# Altium PCB Seets_controller.PcbDoc
Units mm, origin at the board's own origin, x right, y up, seen from the top; angles counter-clockwise.
Board outline 152.4 x 91.44 mm, 2 copper layers (Top Layer, Bottom Layer); 38 components, 34 nets, 140 pads, 32 vias.
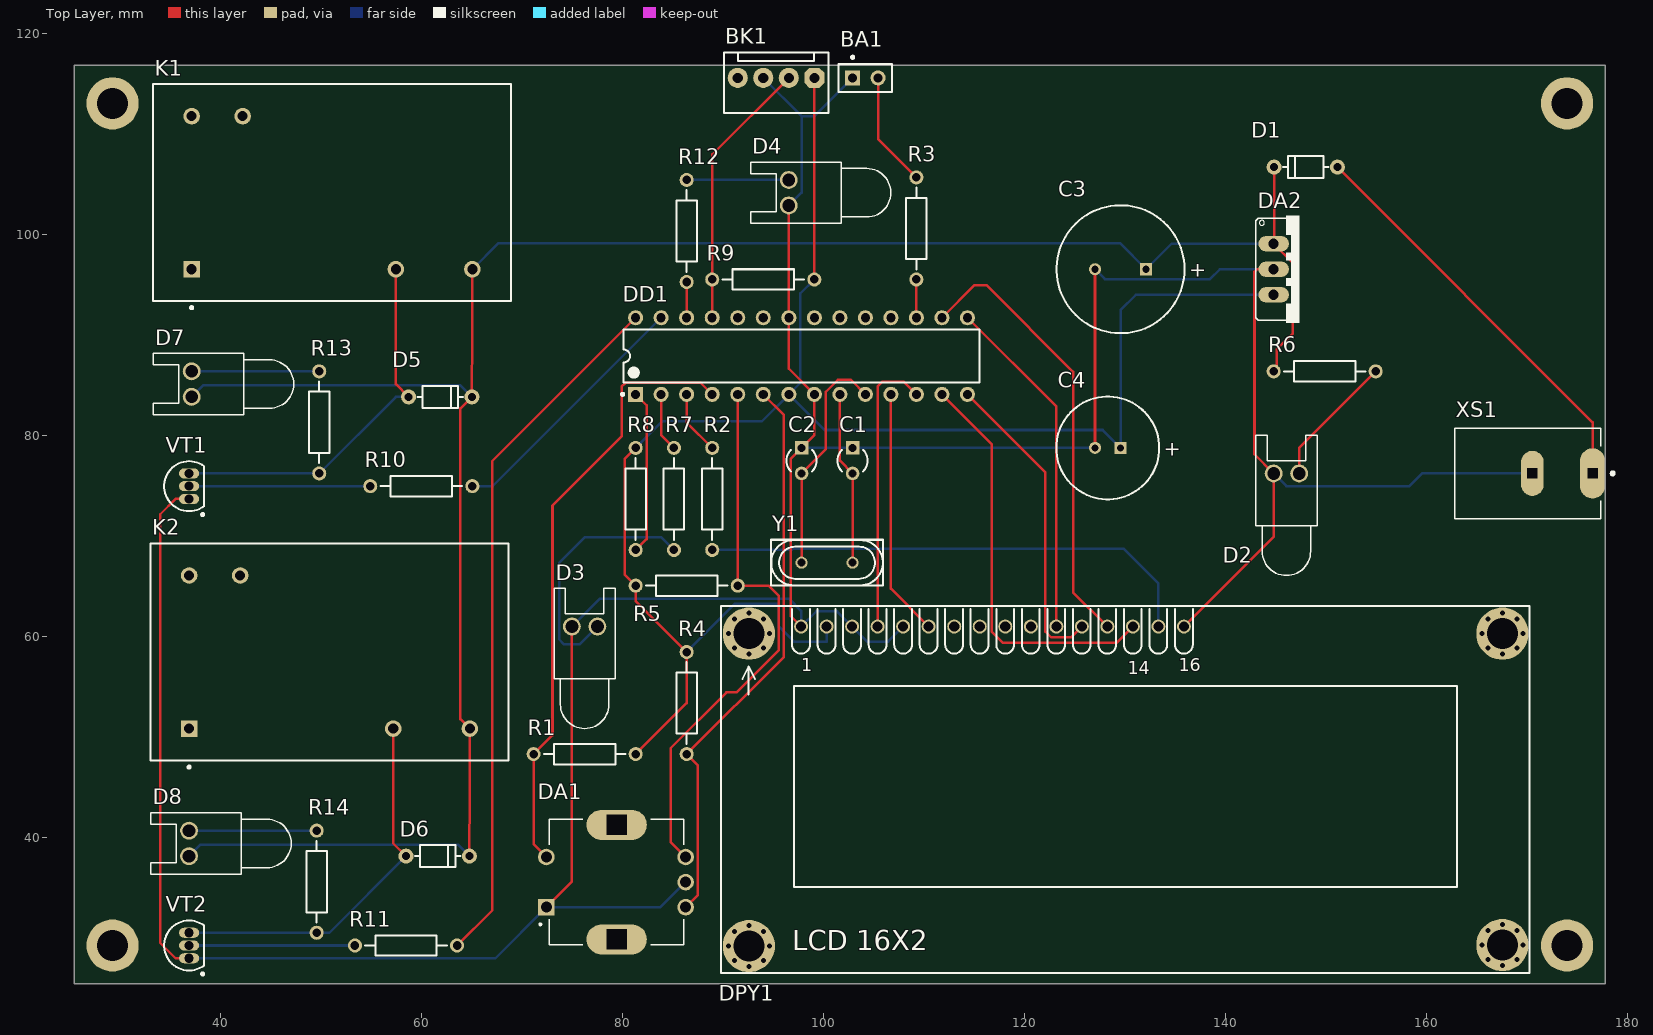
[diagram p0: Top Layer view]
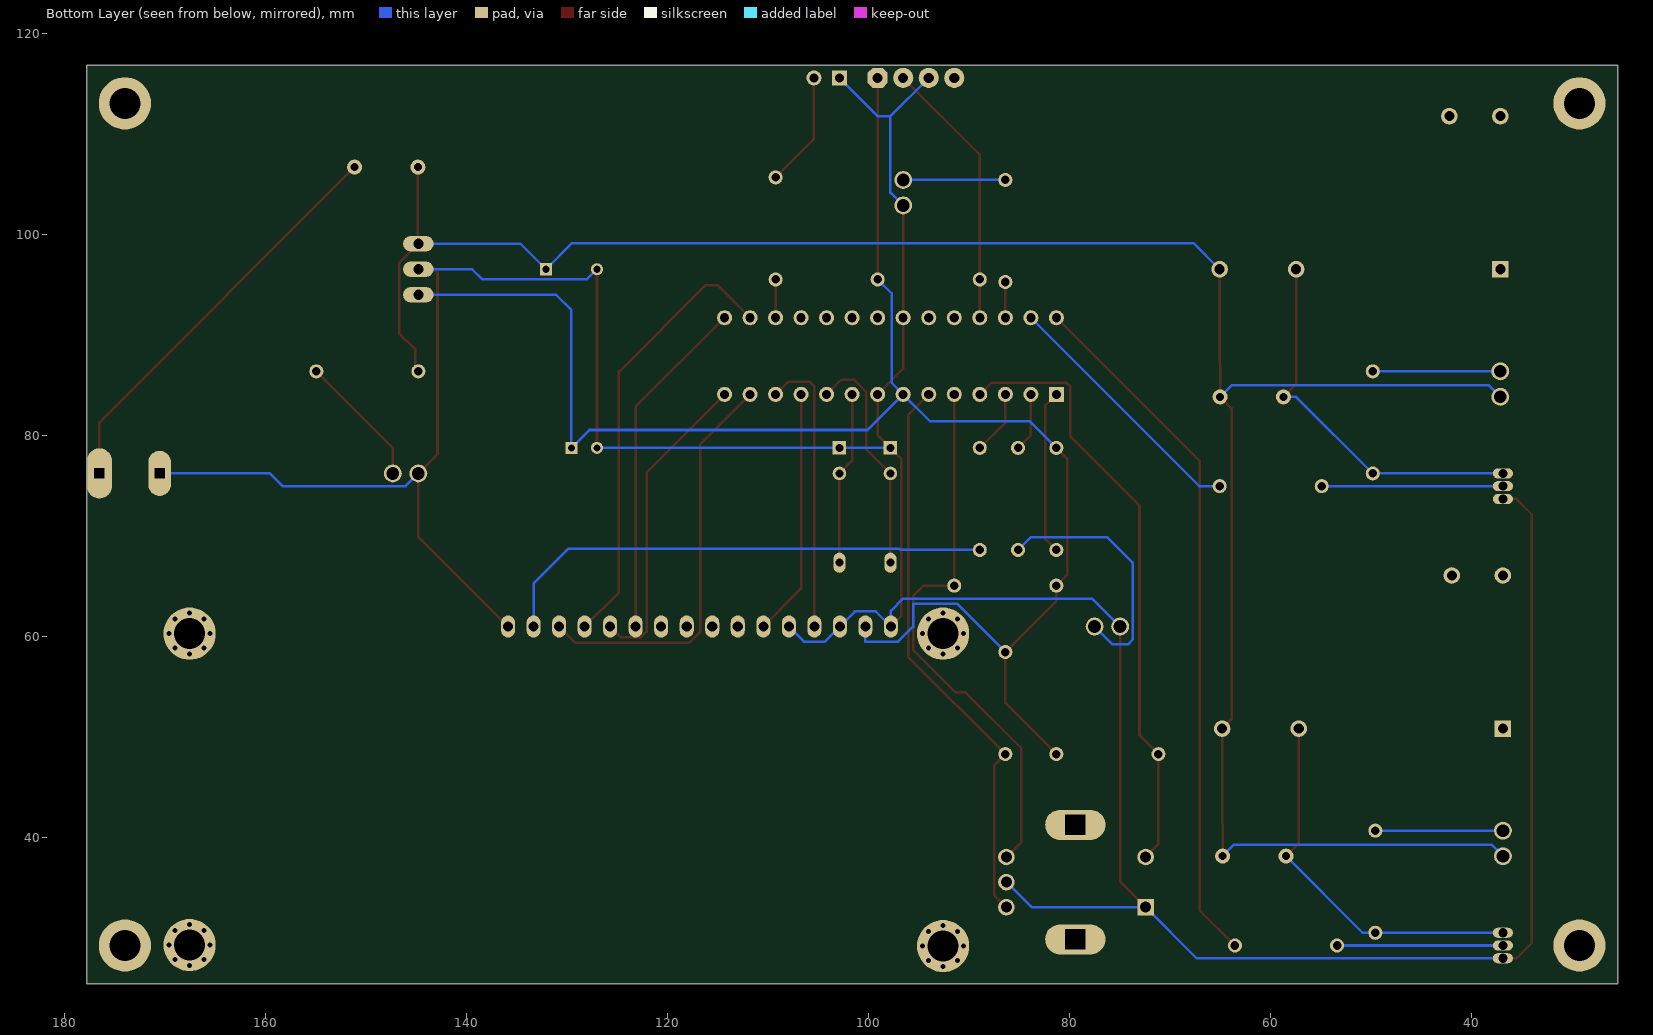
[diagram p1: Bottom Layer view, seen from below]

## Layer stack, top to bottom
Top Solder: solder mask 0.0102, Solder Resist, Dk 3.5
Top Layer: signal copper 0.0356
Dielectric 1: dielectric 0.32, FR-4, Dk 4.8
Bottom Layer: signal copper 0.0356
Bottom Solder: solder mask 0.0102, Solder Resist, Dk 3.5

## Board outline
25.4,25.4 177.8,25.4 177.8,116.84 25.4,116.84

## Design rules (kind name [scope] priority, off if disabled: settings)
Clearance [All] p1: gap=0.254 ignorepadtopadclearanceinfootprint=FALSE except(0: Arc-Hole Track-Hole SMDPad-Hole THPad-Hole Via-Hole Fill-Hole Poly-Hole Region-Hole Text-Hole)
PolygonConnect [All] p1: connectstyle=Relief reliefconductorwidth=0.254 reliefentries=4 polygonreliefangle="90 Angle" airgapwidth=0.254
RoutingVias [All] p1: holewidth=0.711 width=1.27 viastyle="Through Hole" minholewidth=0.711 minwidth=1.27 maxholewidth=0.711 maxwidth=1.27
SolderMaskExpansion [All] p1: expansion=0.102
Width [All] p1: maxlimit=0.254 minlimit=0.254 preferedwidth=0.254
30 further rules are at their usual default settings.

## Components (designator, comment, footprint, x,y, rotation, side; value= is the part's Value field where it differs from the comment)
BA1 "" PIN2 102.87,115.57 r0 top
BK1 "" WF_4 95.25,115.57 r180 top
C1 "" CAPR5-4X5 102.87,77.47 r270 top
C2 "" CAPR5-4X5 97.79,77.47 r270 top
C3 "" RB7.6-15 129.54,96.52 r0 top
C4 "" POLAR0.8 128.27,78.74 r0 top
D1 "" D_AX03_DO35 147.828,106.68 r180 top
D2 "" LED-0 146.05,76.2 r0 top
D3 "" LED-0 76.2,60.96 r0 top
D4 "" LED-0 96.52,104.14 r90 top
D5 "" D_AX03_DO35 61.976,83.82 r0 top
D6 "" D_AX03_DO35 61.722,38.1 r0 top
D7 "" LED-0 37.084,85.09 r90 top
D8 "" LED-0 36.83,39.37 r90 top
DA1 "PEC11R-4215F-S0024" XDCR_PEC11R-4215F-S0024 79.39,35.52 r90 top
DA2 "" 78XXS 147.32,96.52 r270 top
DD1 "ATmega8-16PU" 28P3 97.79,87.884 r90 top
DPY1 "" LCDCHAR_16X2_BLU 130.048,44.704 r0 top
K1 "" MODULE5B 51.054,104.14 r0 top
K2 "" MODULE5B 50.8,58.42 r0 top
R1 "" AXIAL-0.4 76.2,48.26 r180 top
R2 "" AXIAL-0.4 88.9,73.66 r90 top
R3 "" AXIAL-0.4 109.22,100.584 r270 top
R4 "" AXIAL-0.4 86.36,53.34 r90 top
R5 "" AXIAL-0.4 86.36,65.024 r180 top
R6 "" AXIAL-0.4 149.86,86.36 r0 top
R7 "" AXIAL-0.4 85.09,73.66 r270 top
R8 "" AXIAL-0.4 81.28,73.66 r90 top
R9 "" AXIAL-0.4 93.98,95.504 r0 top
R10 "" AXIAL-0.4 59.944,74.93 r0 top
R11 "" AXIAL-0.4 58.42,29.21 r0 top
R12 "" AXIAL-0.4 86.36,100.33 r90 top
R13 "" AXIAL-0.4 49.784,81.28 r90 top
R14 "" AXIAL-0.4 49.53,35.56 r90 top
VT1 "" TO-92A 36.83,74.93 r0 top
VT2 "" TO-92A 36.83,29.21 r0 top
XS1 "Power_connector" CUI_PJ-037AH 176.53,76.2 r180 top
Y1 "" XTLT_2 100.33,67.31 r180 top

## Footprints (in the part's own frame and the unit in brackets; to place one, negate y for a bottom-side part, rotate by r counter-clockwise, add the part's x,y. Pads: shape width x height; smd on the part's side, far side on the other; paste and mask are expansions set on the pad)
28P3 [mm] "DIP, 28-Leads, Row Spacing 7.62mm, Pitch 2.54mm, Body 34.67x7.3mm"
  rect 1.5x1.5 hole 0.9: 1(-3.81,16.51)
  round 1.5 hole 0.9: 2(-3.81,13.97) 3(-3.81,11.43) 4(-3.81,8.89) 5(-3.81,6.35) 6(-3.81,3.81) 7(-3.81,1.27) 8(-3.81,-1.27) 9(-3.81,-3.81) 10(-3.81,-6.35) 11(-3.81,-8.89) 12(-3.81,-11.43) 13(-3.81,-13.97) 14(-3.81,-16.51) 15(3.81,-16.51) 16(3.81,-13.97) 17(3.81,-11.43) 18(3.81,-8.89) 19(3.81,-6.35) 20(3.81,-3.81) 21(3.81,-1.27) 22(3.81,1.27) 23(3.81,3.81) 24(3.81,6.35) 25(3.81,8.89) 26(3.81,11.43) 27(3.81,13.97) 28(3.81,16.51)
  silkscreen extent -3.93,-17.7 2.65,17.93, body extent -3.6,-17.65 3.6,17.65, height 4.58
78XXS [mil]
  oval 60x120 hole 40: 1(-100,-100) 2(0,-100) 3(100,-100)
  silkscreen extent -210,-170 210,0
AXIAL-0.4 [mm] "Axial Device, Thru-Hole; 2 Leads; 0.4 in Pin Spacing"
  round 1.4 hole 0.85: 1(-5.08,0) 2(5.08,0)
  silkscreen extent -4.06,-1.02 4.06,1.02
CAPR5-4X5 [mm] "Capacitor; 2 Leads"
  rect 1.35x1.35 hole 0.8: 1(-1.27,0)
  round 1.35 hole 0.8: 2(1.27,0)
  silkscreen extent -1.06,-1.5 1.06,1.5
CUI_PJ-037AH [mm]
  oval 2.5x5 hole 1 square: 1(0,0)
  oval 2.25x4.5 hole 1 square: 2(6,0)
  silkscreen extent -2.15,-4.5 13.7,4.5, body extent -0.8,-4.5 13.7,4.5, height 11
D_AX03_DO35 [mm] "DIODE 0.3 INCH SPACING DO35"
  round 1.5 hole 0.8: 1(-3.3,0) 2(3,0)
  silkscreen extent -2.39,-1.1 2.1,1.1, body extent -4.19,-0.96 3.99,0.96, height 1.96
LCDCHAR_16X2_BLU [mm] "LCD Characters Display, 2linesX16char, Blue, header1x16"
  round 1.4 / inner round 1.4 / far side oval 1.4x2.2 hole 1: 1(-32.3,16.25) 2(-29.76,16.25) 3(-27.22,16.25) 4(-24.68,16.25) 5(-22.14,16.25) 6(-19.6,16.25) 7(-17.06,16.25) 8(-14.52,16.25) 9(-11.98,16.25) 10(-9.44,16.25) 11(-6.9,16.25) 12(-4.36,16.25) 13(-1.82,16.25) 14(0.72,16.25) 15(3.26,16.25) 16(5.8,16.25)
  round 5.2 hole 3.1: MH1(-37.5,15.55) MH2(-37.5,-15.55) MH3(37.5,-15.45) MH4(37.5,15.55)
  silkscreen extent -40.29,-18.22 40.21,18.28, body extent -40,-18 40,18, height 24.8
LED-0 [mil] "LED; 2 Leads"
  round 70 hole 50: 1(50,0) 2(-50,0)
  silkscreen extent -120,-400 120,150
MODULE5B [mm] "DIP; 5 Round Pins; Row Space 15.24 mm; Pitch 2.54 mm"
  rect 1.65x1.65 hole 1: 1(-13.97,-7.62)
  round 1.65 hole 1: 2(-13.97,7.62) 3(-8.89,7.62) 4(13.97,-7.62) 5(6.35,-7.62)
  silkscreen extent -17.8,-11.57 17.8,10.8, body extent -17.8,-10.8 17.8,10.8, height 14
PIN2 [mm] "Photosensitive Diode; 2 Leads"
  rect 1.5x1.5 hole 0.9: 1(0,0)
  round 1.5 hole 0.9: 2(2.54,0)
  silkscreen extent -1.4,-1.4 3.94,2.17
POLAR0.8 [mm] "Polarized Capacitor; 2 Leads"
  rect 1.2x1.2 hole 0.7: 1(1.27,0)
  round 1.2 hole 0.7: 2(-1.27,0)
  silkscreen extent -5.12,-5.12 5.12,5.12
RB7.6-15 [mm] "Polarized Capacitor (Radial); 2 Leads"
  rect 1.2x1.2 hole 0.7: 1(2.54,0)
  round 1.2 hole 0.7: 2(-2.54,0)
  silkscreen extent -6.37,-6.37 6.37,6.37
TO-92A [mm] "TO, Flat Index; 3 In-Line, Axial Leads; Body Dia. 4.5mm; Leads 0.51 x 0.48 mm (max)"
  oval 2x1 hole 0.9: 1(0,-1.27) 2(0,0) 3(0,1.27)
  silkscreen extent -2.48,-2.95 1.5,2.48, body extent -2.48,-2.5 1.5,2.5, height 6.86
WF_4 [mm] "DS1070  WF, Cvilux CI31 pitch 2.54mm"
  oct 2x2 hole 1: 1(-3.81,0)
  round 2 hole 1: 2(-1.27,0) 3(1.27,0) 4(3.81,0)
  silkscreen extent -5.2,-2.55 5.2,3.5, body extent -5.08,-2.4 5.08,3.4, height 11.56
XDCR_PEC11R-4215F-S0024 [mm]
  rect 1.65x1.65 hole 1.1: 1(-2.5,7)
  round 1.65 hole 1.1: 2(2.5,7) A(-2.5,-6.858) B(2.5,-6.858) COM(0,-6.858)
  oval 3x6 hole 2 square: S1(-5.7,0) S2(5.7,0)
  silkscreen extent -6.25,-6.7 6.25,7.7
XTLT_2 [mm] "Crystal PTH HC49S"
  round 1.2 / inner oval 1.2x2 / far side oval 1.2x2 hole 0.8: 1(-2.54,0)
  round 1.2 / inner round 1.2 / far side oval 1.2x2 hole 0.8: 2(2.54,0)
  silkscreen extent -5.59,-2.29 5.59,2.29, body extent -5.67,-2.32 5.67,2.33, height 3.6

## Part data
BA1: library part Speaker, "Loudspeaker", LatestRevisionDate=17-Jul-2002, LatestRevisionNote="Re-released for DXP Platform.", PackageReference=PIN2, Published=24-Mar-1999, Publisher="Altium Limited"
BK1: library part HUM_AM2301, "Sensor, Humidity+Temp, Digital, Capacitive", PARAM2=PARAM2
C1 C2: library part Cap, "Capacitor", LatestRevisionDate=17-Jul-2002, LatestRevisionNote="Re-released for DXP Platform.", PackageDescription="Radial Cap, Thru-Hole; 2 Leads; 0.3 in Pin Spacing", PackageReference=RAD-0.3, Published=8-Jun-2000, Publisher="Altium Limited"
C3 C4: library part "Cap Pol2", "Polarized Capacitor (Axial)", LatestRevisionDate=17-Jul-2002, LatestRevisionNote="Re-released for DXP Platform.", PackageDescription="Polarized Capacitor; 2 Leads", PackageReference=POLAR0.8, Published=8-Jun-2000, Publisher="Altium Limited"
D1 D5 D6: library part Diode, "Default Diode", Code_JEDEC=DO-214-AB, LatestRevisionDate=17-Jul-2002, LatestRevisionNote="Re-released for DXP Platform.", PackageDescription="DO-214-AB/SMC; 2 C-Bend Leads; Body 7.9 x 5.9 mm, inc. leads (LxW)", PackageReference=SMC, PackageVersion=Sep-1996, Published=8-Jun-2000, Publisher="Altium Limited"
D2 D3 D4 D7 D8: library part LED0, "Typical INFRARED GaAs LED", LatestRevisionDate=08-Jul-2005, LatestRevisionNote="Mech Layer 1 removed.", PackageDescription="LED; 2 Leads", PackageReference=LED-0, Published=8-Jun-2000, Publisher="Altium Limited"
DA1: "Incremental Encoder, 12 Mm, Contact Rating 10 Ma - 5 Vdc", Package=None, Availability=Unavailable, MP=PEC11R-4215F-S0024, PRICE=None
DA2: library part LM7805, "IC REG LIN 5V 1A"
DD1: library part CMP-0095-00372-1, "8-bit AVR Microcontroller, 4.5-5.5V, 16MHz, 8KB Flash, 512 Bytes EEPROM, 1KB SRAM, 28-pin PDIP, Industrial Grade (-40癈 to 85癈)", ComponentLink1Description="Manufacturer URL", ComponentLink1URL=http://www.atmel.com/, ComponentLink2Description=ATmega8(L), ComponentLink2URL=http://www.atmel.com/dyn/resources/prod_documents/doc2486.pdf, ComponentLink3Description="ATmega8(L) Summary", ComponentLink3URL=http://www.atmel.com/dyn/resources/prod_documents/2486S.pdf, DatasheetVersion="revZ, Feb-2011", PackageDescription="28-lead (0.300\"/7.62mm Wide) Plastic Dual Inline Package (PDIP)", PackageReference=28P3, PackageVersion="revB, Sep-2001"
DPY1: library part LCDCHAR_16X2_BLU, "LCD Character Disp, 16X2", MANF=Newhaven, MANF_P#=NHD-0216K3Z-NSW-BBW-V3, PARAM="2 lines x 16 characters", PARAM2="Blue back, White, 5V"
K1 K2: library part Relay-SPDT, "Single-Pole Dual-Throw Relay", LatestRevisionDate=17-Jul-2002, LatestRevisionNote="Re-released for DXP Platform.", PackageReference=MODULE5B, Published=24-Mar-1999, Publisher="Altium Limited"
R1 R2 R3 R4 R5 R6 R7 R8 R9 R10 R11 R12 R13 R14: library part Res2, "Resistor", LatestRevisionDate=17-Jul-2002, LatestRevisionNote="Re-released for DXP Platform.", PackageDescription="Axial Device, Thru-Hole; 2 Leads; 0.4 in Pin Spacing", PackageReference=AXIAL-0.4, Published=8-Jun-2000, Publisher="Altium Limited"
VT1 VT2: library part 2N3904, "NPN General Purpose Amplifier", ComponentLink1Description="Manufacturer Link", ComponentLink1URL=http://www.fairchildsemi.com/, ComponentLink2Description=Datasheet, ComponentLink2URL=http://www.fairchildsemi.com/ds/2N%2F2N3904.pdf, DatasheetVersion=1997, LatestRevisionDate=15-Jan-2003, LatestRevisionNote="PCB Footprint 'BCY-W3/D4.7' replaced", PackageDescription="TO, Flat Index; 3 In-Line, Axial Leads; Body Dia. 4.5mm; Leads 0.51 x 0.48 mm (max)", PackageReference=TO-92A, PackageVersion=Sep-1998, Published=8-Jun-2000, Publisher="Altium Limited"
Y1: library part XTAL, "Crystal Oscillator", LatestRevisionDate=17-Jul-2002, LatestRevisionNote="Re-released for DXP Platform.", PackageDescription="Crystal, Thru-Hole; 2 Leads; Body 3.1 x 8.2 mm (Dia.xH)", PackageReference=R38, Published=8-Jun-2000, Publisher="Altium Limited"

## Free pads (board coordinates)
  round 5.2 hole 3.1: 0(29.21,29.21) 0(29.21,113.03) 0(173.99,29.21) 0(173.99,113.03)

## Via types
v1: diameter 1, hole 0.5, Top Layer to Bottom Layer, 32 vias

## Nets (pads, with @x,y where several pads share a name; then routed paths per layer and width w, separated by ;. In a path a pad name is that pad's centre, name@x,y a point inside that pad or via, vN(x,y) a via of type N, cw(c..) or ccw(c..) an arc to the next point about the centre after c; other vN are vias at no path point)
+12: D1.1 XS1.1 | length 41
  Top Layer w0.254: D1.1 176.53,81.278 XS1.1
Anod: DPY1.15 R2.1 | length 50.2
  Bottom Layer w0.254: R2.1 96.799,68.58 96.926,68.707 129.854,68.707 133.308,65.253 DPY1.15
before_stab: C3.1 D1.2 D5.2 D6.2 D7.2 D8.2 DA2.1 K1.4 K2.4 R6.1 | length 222.1
  Top Layer w0.254: D6.2 64.77,44.498 K2.4 63.83,51.74 63.83,82.674 D5.2 65.024,90.218 K1.4 ; R6.1 145.11,86.36 145.11,88.57 146.685,90.145 146.685,97.155 DA2.1 144.828,99.06 D1.2
  Bottom Layer w0.254: D8.2 37.973,39.243 63.579,39.243 D6.2 ; D7.2 38.227,84.963 63.833,84.963 D5.2 ; K1.4 67.615,99.111 129.489,99.111 C3.1 134.62,99.06 DA2.1
D7: DD1.13 DPY1.14 | length 40.8
  Top Layer w0.254: DD1.13 116.713,79.121 116.713,60.452 117.8,59.365 129.179,59.365 DPY1.14
E: DD1.11 DPY1.6 | length 24.7
  Top Layer w0.254: DD1.11 106.68,64.722 DPY1.6
GND: BA1.1 BK1.3 C1.1 C2.1 C3.2 C4.2 D2.2 D3.2 D4.2 DA1.1 DA1.COM DA2.2 DD1.8 DD1.22 DPY1.1 DPY1.3 DPY1.5 DPY1.16 VT1.1 VT2.1 XS1.2 | length 369.9
  Top Layer w0.254: VT2.1 35.484,27.94 33.96,29.464 33.96,72.136 35.484,73.66 VT1.1 ; DA1.1 74.93,35.56 D3.2 ; D4.2 DD1.22 96.52,86.614 DD1.8 99.06,80.01 C2.1 96.723,77.673 96.723,61.979 DPY1.1 ; C4.2 C3.2 ; DPY1.16 144.78,69.886 D2.2 142.875,78.105 142.875,96.266 143.129,96.52 DA2.2
  Bottom Layer w0.254: VT2.1 67.31,27.94 DA1.1 83.748,33.02 DA1.COM ; D3.2 77.713,63.743 96.52,63.743 97.748,62.515 DPY1.1 99.253,62.459 101.323,62.459 DPY1.3 104.321,59.461 106.415,59.461 DPY1.5 ; BK1.3 97.79,111.76 ; D4.2 97.79,104.14 97.79,111.76 ; C2.1 C1.1 C4.2 ; BA1.1 99.06,111.76 97.79,111.76 ; C3.2 127.991,95.529 138.43,95.529 139.421,96.52 DA2.2 ; D2.2 146.05,74.93 158.293,74.93 159.563,76.2 XS1.2
NetBA1_2: BA1.2 R3.1 | length 11.5
  Top Layer w0.254: BA1.2 105.41,109.474 R3.1
NetBK1_2: BK1.2 DD1.25 R9.1 | length 27
  Top Layer w0.254: DD1.25 R9.1 88.9,107.95 BK1.2
NetC1_2: C1.2 DD1.9 Y1.1 | length 17.3
  Top Layer w0.254: DD1.9 101.6,77.47 C1.2 Y1.1
NetC2_2: C2.2 DD1.10 Y1.2 | length 23
  Top Layer w0.254: Y1.2 C2.2 100.203,78.613 100.203,84.328 101.397,85.522 102.692,85.522 DD1.10
NetD2_1: D2.1 R6.2 | length 13.3
  Top Layer w0.254: D2.1 147.32,78.74 R6.2
NetD3_1: D3.1 R7.2 | length 25.3
  Bottom Layer w0.254: D3.1 75.692,59.182 74.168,59.182 73.66,59.69 73.66,67.285 76.2,69.825 83.845,69.825 R7.2
NetD4_1: D4.1 R12.2 | length 10.2
  Bottom Layer w0.254: R12.2 D4.1
NetD5_1: D5.1 K1.5 R13.1 VT1.3 | length 38.2
  Top Layer w0.254: K1.5 57.404,85.092 D5.1
  Bottom Layer w0.254: VT1.3 R13.1 57.404,83.82 D5.1
NetD6_1: D6.1 K2.5 R14.1 VT2.3 | length 38
  Top Layer w0.254: K2.5 57.15,39.372 D6.1
  Bottom Layer w0.254: VT2.3 43.18,30.48 R14.1 50.802,30.48 D6.1
NetD7_1: D7.1 R13.2 | length 12.7
  Bottom Layer w0.254: D7.1 R13.2
NetD8_1: D8.1 R14.2 | length 12.7
  Bottom Layer w0.254: D8.1 43.18,40.64 R14.2
NetDA1_2: DA1.2 DD1.4 R1.2 | length 60.6
  Top Layer w0.254: DA1.2 71.12,39.29 R1.2 73,50.14 73,73 79.883,79.883 79.883,84.836 80.264,85.217 87.757,85.217 DD1.4
NetDA1_A: DA1.A DD1.6 R4.1 | length 56.9
  Top Layer w0.254: DA1.A 87.478,34.25 87.478,47.142 R4.1 96.037,57.937 96.037,82.017 DD1.6
NetDA1_B: DA1.B DD1.5 R5.1 | length 55.2
  Top Layer w0.254: DA1.B 84.76,39.508 84.76,48.844 90.322,54.407 91.295,54.407 95.529,58.641 95.529,64.008 94.513,65.024 R5.1 DD1.5
NetDD1_1: DD1.1 R8.1 | length 16.4
  Top Layer w0.254: R8.1 82.372,69.672 82.372,82.982 DD1.1
NetDD1_2: DD1.2 R7.1 | length 5.9
  Top Layer w0.254: DD1.2 83.82,80.01 R7.1
NetDD1_3: DD1.3 R2.2 | length 6.4
  Top Layer w0.254: DD1.3 86.36,81.28 R2.2
NetDD1_14: DD1.14 DPY1.12 | length 31.1
  Top Layer w0.254: DD1.14 122.067,76.307 122.067,60.452 122.646,59.873 124.607,59.873 DPY1.12
NetDD1_15: DD1.15 DPY1.11 | length 34.4
  Top Layer w0.254: DD1.15 123.148,82.846 DPY1.11
NetDD1_16: DD1.16 DPY1.13 | length 44.7
  Top Layer w0.254: DD1.16 115.011,94.945 116.18,94.945 124.816,86.309 124.816,64.366 DPY1.13
NetDD1_17: DD1.17 R3.2 | length 3.8
  Top Layer w0.254: DD1.17 R3.2
NetDD1_26: DD1.26 R12.1 | length 3.6
  Top Layer w0.254: DD1.26 86.36,93.447 R12.1
NetDD1_27: DD1.27 R10.2 | length 25.7
  Bottom Layer w0.254: R10.2 67.056,74.93 DD1.27
NetDD1_28: DD1.28 R11.2 | length 69.8
  Top Layer w0.254: R11.2 67.005,32.715 67.005,77.419 DD1.28
NetR10_1: R10.1 VT1.2 | length 18
  Bottom Layer w0.254: VT1.2 45.847,74.93 R10.1
NetR11_1: R11.1 VT2.2 | length 16.5
  Bottom Layer w0.254: VT2.2 45.085,29.21 R11.1
RS: DD1.12 DPY1.4 | length 28.5
  Top Layer w0.254: DPY1.4 105.368,84.845 105.867,85.344 107.95,85.344 DD1.12
VCC: BK1.1 C4.1 DA2.3 DD1.7 DPY1.2 R1.1 R4.2 R5.2 R8.2 R9.2 | length 170.7
  Top Layer w0.254: R1.1 86.36,53.34 R4.2 81.28,63.5 R5.2 80.188,66.116 80.188,77.648 R8.2 ; R9.2 BK1.1
  Bottom Layer w0.254: R8.2 83.922,81.382 93.828,81.382 DD1.7 ; R4.2 91.175,63.235 95.504,63.235 95.529,63.21 95.529,60.96 97.028,59.461 100.288,59.461 DPY1.2 ; R9.2 97.663,94.107 97.663,85.217 DD1.7 ; DA2.3 131.064,93.98 129.54,92.456 C4.1 127.762,80.518 100.076,80.518 DD1.7
pads on no net: BK1.4 DA1.S1 DA1.S2 DD1.18 DD1.19 DD1.20 DD1.21 DD1.23 DD1.24 DPY1.7 DPY1.8 DPY1.9 DPY1.10 DPY1.MH1 DPY1.MH2 DPY1.MH3 DPY1.MH4 K1.1 K1.2 K1.3 K2.1 K2.2 K2.3
copper on no net:
  other v1: 92.548,27.104 167.548,27.204 91.098,27.704 93.997,27.704 166.098,27.804 168.997,27.804 90.498,29.154 94.598,29.154 165.498,29.254 169.598,29.254 91.098,30.603 93.997,30.603 166.098,30.703 168.997,30.703 92.548,31.204 167.548,31.304 92.548,58.204 167.548,58.204 91.098,58.804 93.997,58.804 166.098,58.804 168.997,58.804 90.498,60.254 94.598,60.254 165.498,60.254 169.598,60.254 91.098,61.704 93.997,61.704 166.098,61.704 168.997,61.704 92.548,62.304 167.548,62.304

## Silkscreen, mask and mechanical layers (free items; w line width, h text height)
Top Paste:
  lines w0.254: 35.692,31.051 ccw(c31.5,31.75) 35.75,31.75

## Text inside footprints (layer, text, board x,y; h text height)
C3: Top Overlay "+" at 136.398,95.758 h1.5
C4: Top Overlay "+" at 133.858,77.978 h1.5
DA2: Mechanical 13 "O" at 143.507,94.614 h1.27 r270; Mechanical 13 "I" at 143.505,99.699 h1.27 r270; Mechanical 13 "-" at 143.508,97.155 h1.27 r270
DPY1: Top Overlay "14" at 130.252,56.233 h1.27; Top Overlay "1" at 97.74,56.487 h1.27; Top Overlay "16" at 135.332,56.487 h1.27; Top Overlay "LCD 16X2" at 96.866,28.758 h2